# EAGLE board modulo_RJ11_5a (EAGLE 6.5.0)
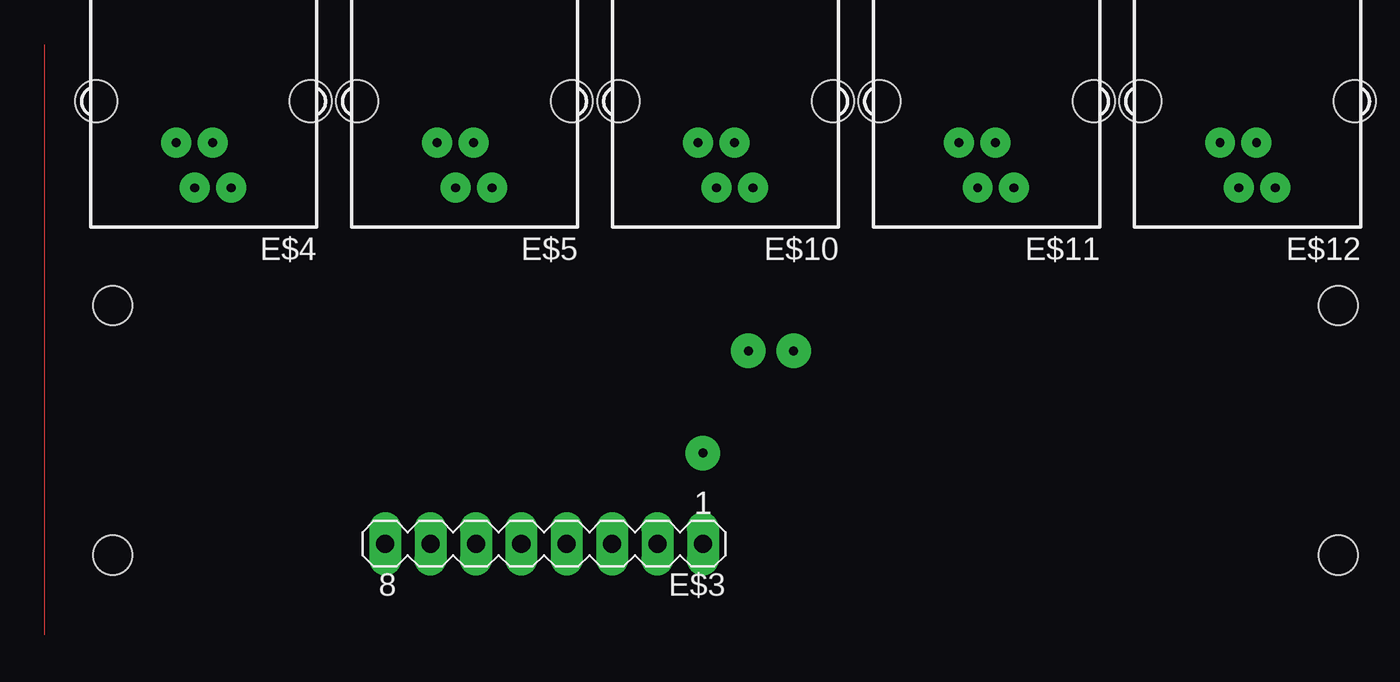
[diagram p0: board, top side]
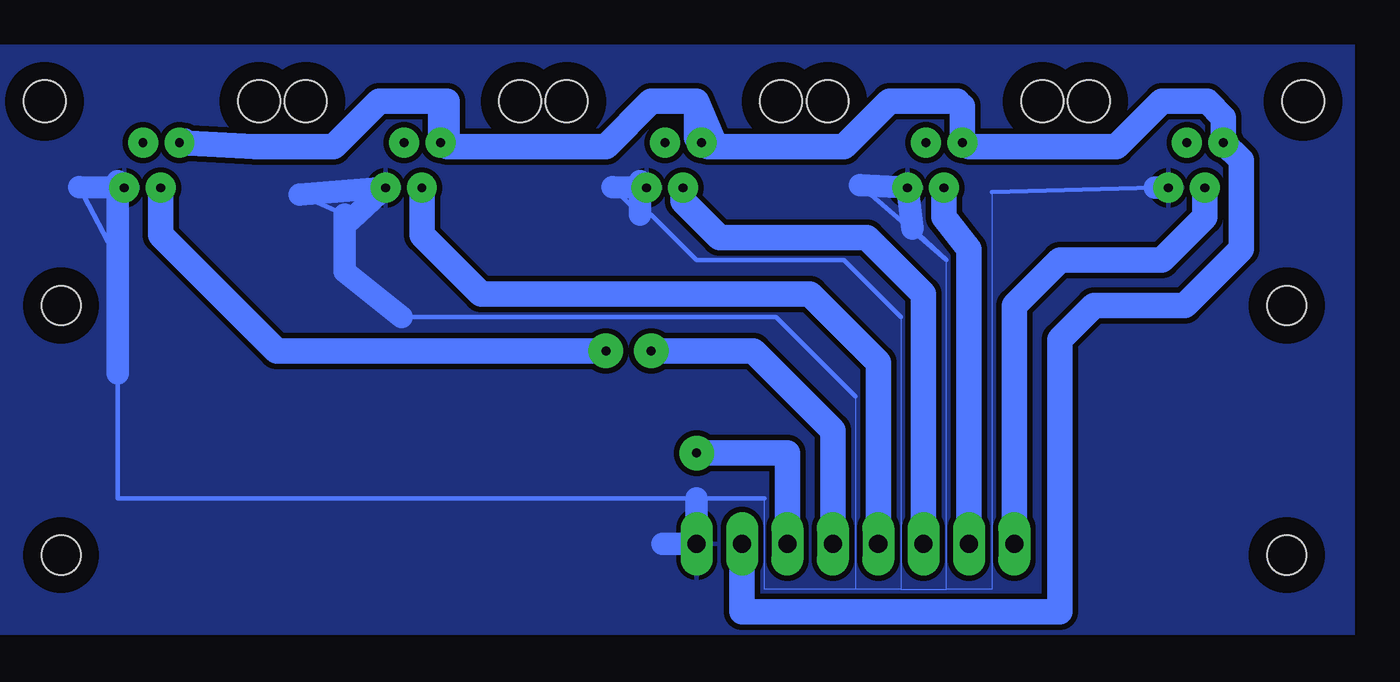
[diagram p1: board, bottom side, seen from below]

No outline drawn. Coordinates in mm, seen from the top.
Copper layers (1*16): Top 0.035mm / dielectric 1.5mm / Bottom 0.035mm
Design rules "default *": minimum track width 10mil, minimum drill 24mil, track to track 8mil, track to pad 8mil, pad to pad 8mil, via to via 8mil, smd to smd 8mil, copper to edge 40mil, drill to drill 8mil, minimum pad ring 15mil, minimum via ring 15mil, stop-mask expansion 4mil, vias tented up to drill 0mil, thermal gap 10mil
Holes 2.2 mm at 3.81,18.41 3.81,4.45 72.39,4.45 72.39,18.41

## Footprints (pad centres in the part's own frame; a part is rotated, then mirrored left to right if it is on the bottom)
MA08-1 = drill 1.016 long: 1 -8.89,0; 2 -6.35,0; 3 -3.81,0; 4 -1.27,0; 5 1.27,0; 6 3.81,0; 7 6.35,0; 8 8.89,0
YH-55-10 = drill 0.5 pad 1.676: 2 -1.54,4.84; 3 -0.5,2.3; 4 0.5,4.84; 5 1.54,2.3 | hole 2.36: -6,0; 6,0

## Placement (x,y rotation side)
E$3  [MA08-1]  27.94,5.08 180 top
E$4  [YH-55-10]  8.89,29.84 180 top
E$5  [YH-55-10]  23.5,29.84 180 top
E$10  [YH-55-10]  38.1,29.84 180 top
E$11  [YH-55-10]  52.7,29.84 180 top
E$12  [YH-55-10]  67.31,29.84 180 top

## Library data of the parts
E$3 = con-lstb
E$4 E$5 E$10-E$12 = ARDUINO2

## Nets
GND: E$3.1 E$4.2 E$5.2 E$10.2 E$11.2 E$12.2
S$1: E$3.3
S$2: E$3.4
S$3: E$3.5
S$4: E$3.6
S$5: E$3.7
S$6: E$3.8
S$15: E$3.2

## Tracks (layer width: path | path; a pad name or v marks a point on that pad's centre or on a via)
GND
  Bottom 0: 20.32,24.77 20.32,2.54 22.86,2.54 | 22.86,2.54 22.86,20.95 | 25.4,17.78 25.4,2.54 | 25.4,2.54 22.86,2.54 | 25.4,2.54 27.94,2.54 | 27.94,13.34 27.94,2.54 | 27.94,2.54 33.02,2.54 33.02,7.62
  Bottom 0.254: 11.19,25 20.32,24.77 | 27.7,25.16 22.86,20.95 24.77,22.73 | 25.4,17.78 28.57,20.95 36.83,20.95 39.37,23.5 40.01,23.5 41.55,25.04 | 59.05,24.64 56.52,23.5 56.15,23.23 | 53.34,17.78 32.38,17.78 27.94,13.34 | 69.22,25.37 E$12.2 | 71.39,25.04 69.22,20.95 | 69.22,14.61 69.22,7.62 36.83,7.62 33.02,7.62
  Bottom 1.27: E$4.2 11.19,25 | 24.77,22.73 E$5.2 27.7,25.16 | 40.01,23.5 40.01,25.37 E$10.2 41.55,25.04 | 59.05,24.64 E$11.2 56.15,23.23 | 56.52,23.5 56.52,20.32 53.34,17.78 | 69.22,14.61 69.22,20.95 69.22,25.37 | E$12.2 71.39,25.04 | 36.83,7.62 E$3.1 38.73,5.08
  pour Bottom (isolate 0.305): 0,0 76.2,0 76.2,33.02 0,33.02
S$1
  Bottom 1.422: 36.83,10.16 31.75,10.16 E$3.3
S$2  (via drill 0.5 pad 1.93)
  Bottom 1.422: E$3.4 29.21,11.43 33.66,15.88 v39.37,15.88
S$3
  Bottom 1.422: 52.2,25 52.2,22.36 48.9,19.05 30.48,19.05 26.67,15.24 E$3.5
S$4
  Bottom 1.422: 37.6,25 37.6,24.27 35.56,22.23 27.3,22.23 24.13,19.05 E$3.6
S$5
  Bottom 1.422: 23,25 23,23.36 21.59,21.59 E$3.7
S$6
  Bottom 1.422: 8.39,25 8.39,23.36 10.79,20.95 16.51,20.95 19.05,18.41 E$3.8
S$7  (via drill 0.5 pad 1.93)
  other vias: 36.83,10.16
S$8
  Bottom 0.813: 21.95,27.55 21.59,27.18 22.23,29.84 21.95,29.57 | 36.83,27.82 36.56,27.55 | 51.16,27.55 50.8,27.82 50.8,29.84 51.16,29.57 | 65.77,27.67 65.41,27.94
  Bottom 1.016: 21.59,27.3 22.23,29.84
  Bottom 1.422: 6.35,21.83 6.35,26.55 7.35,27.55 7.35,28.94 8.26,29.84 10.79,29.84 13.34,27.3 21.59,27.3 | 21.95,27.55 21.95,29.57 | 22.23,29.84 26.04,29.84 28.57,27.3 36.2,27.3 35.92,27.67 | 35.92,27.67 36.83,29.84 | 36.83,29.84 36.83,27.82 | 36.56,27.55 35.92,27.67 | 36.83,29.84 39.37,29.84 41.91,27.3 50.8,27.3 50.8,29.84 54.61,29.84 57.15,27.3 61.56,27.3 65.77,27.55 65.77,27.67 | 51.16,27.55 51.16,29.57
S$9  (via drill 0.5 pad 1.93)
  Bottom 1.422: 66.81,25 66.81,22.36 60.33,15.88 v41.91,15.88
S$12
  Top 0: 0,0 0,33.02
S$15
  Bottom 1.422: 6.35,21.59 9.53,18.41 14.61,18.41 16.51,16.51 16.51,1.27 34.29,1.27 E$3.2